# EAGLE board dragonjoy - double (EAGLE 7.3.0)
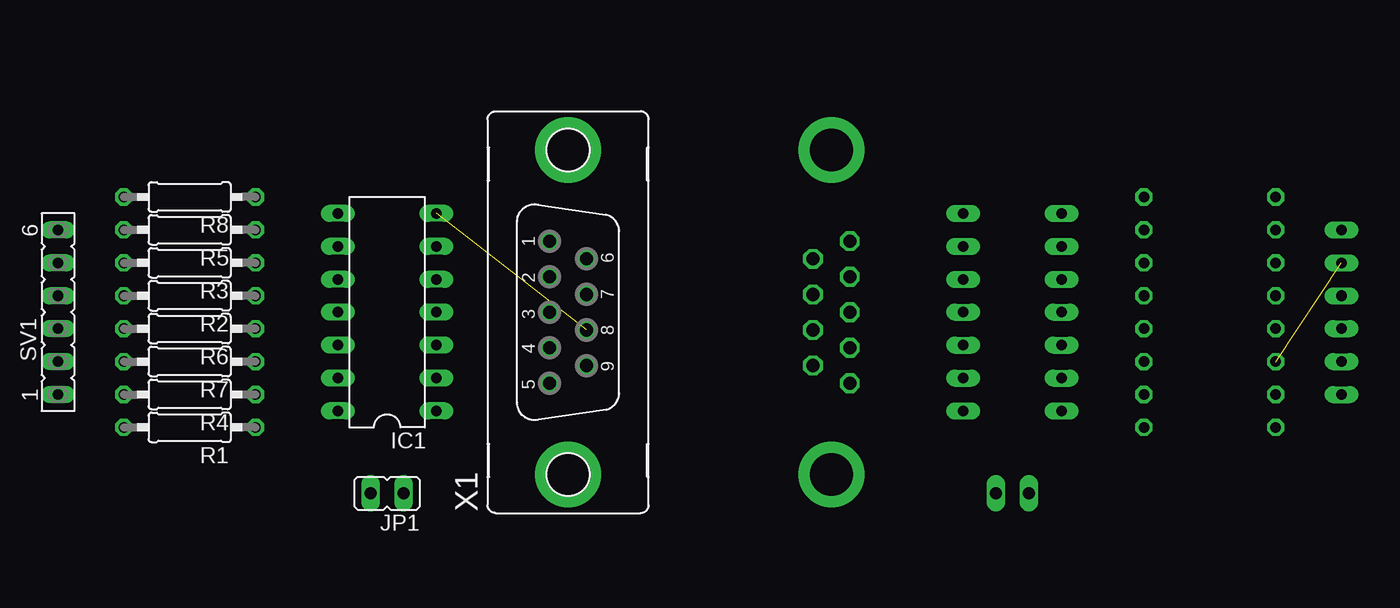
[diagram p0: board, top side]
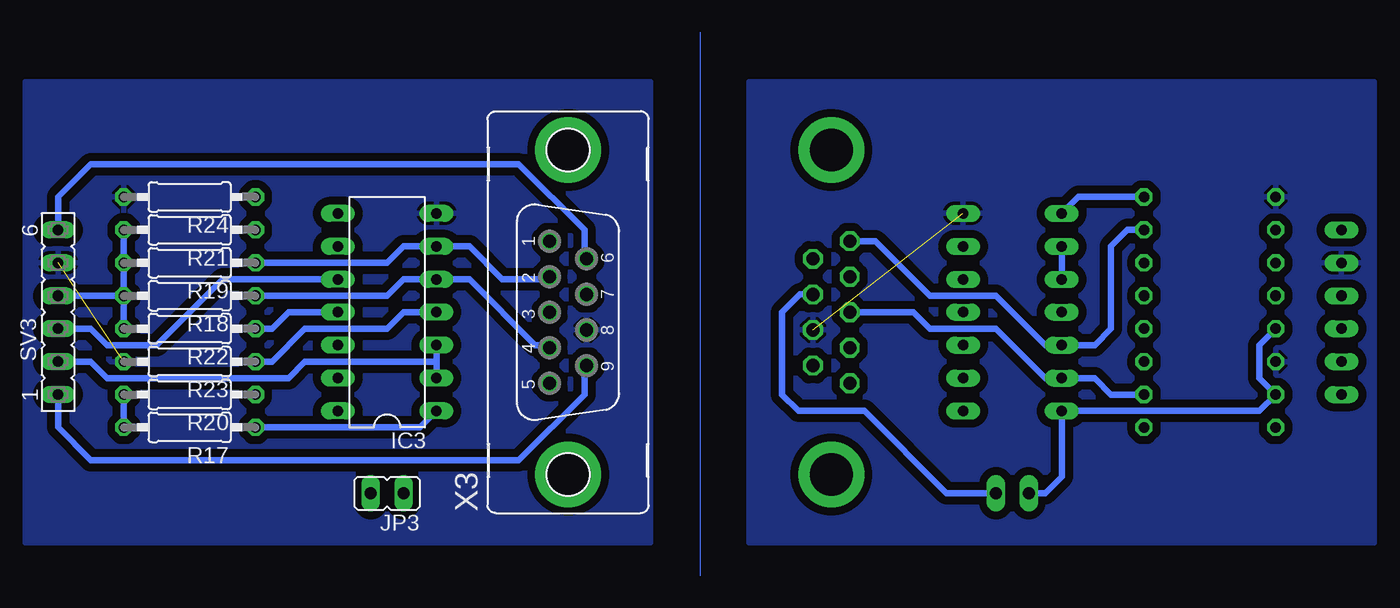
[diagram p1: board, bottom side, seen from below]

No outline drawn. Coordinates in mm, seen from the top.
Copper layers (1*16): Top 0.035mm / dielectric 1.5mm / Bottom 0.035mm
Design rules "default": minimum track width 10mil, minimum drill 24mil, track to track 8mil, track to pad 8mil, pad to pad 8mil, via to via 8mil, smd to smd 8mil, copper to edge 40mil, drill to drill 8mil, minimum pad ring 10mil, minimum via ring 8mil, stop-mask expansion 4mil, vias tented up to drill 0mil, thermal gap 10mil

## Footprints (pad centres in the part's own frame; a part is rotated, then mirrored left to right if it is on the bottom)
DIL14 = drill 0.813 long: 1 -7.62,-3.81; 2 -5.08,-3.81; 3 -2.54,-3.81; 4 0,-3.81; 5 2.54,-3.81; 6 5.08,-3.81; 7 7.62,-3.81; 8 7.62,3.81; 9 5.08,3.81; 10 2.54,3.81; 11 0,3.81; 12 -2.54,3.81; 13 -5.08,3.81; 14 -7.62,3.81
JP1 = drill 0.914 long: 1 0,-1.27; 2 0,1.27
0207/10 = drill 0.813 octagon: 1 -5.08,0; 2 5.08,0
FE06 = drill 0.813 long: 1 -6.35,0; 2 -3.81,0; 3 -1.27,0; 4 1.27,0; 5 3.81,0; 6 6.35,0
F09VP = drill 1.016 octagon: 1 5.486,1.422; 2 2.743,1.422; 3 0,1.422; 4 -2.743,1.422; 5 -5.486,1.422; 6 4.115,-1.422; 7 1.372,-1.422; 8 -1.372,-1.422; 9 -4.115,-1.422 | drill 3.302 pad 5.08: G1 -12.522,0; G2 12.522,0

## Placement (x,y rotation side)
IC1  4066N  [DIL14]  27.94,53.34 90 top
IC3  4066N  [DIL14]  76.2,53.34 90 bottom
JP1  [JP1]  27.94,39.37 90 top
JP3  [JP1]  76.2,39.37 90 bottom
R1  [0207/10]  12.7,44.45 180 top
R2  [0207/10]  12.7,54.61 180 top
R3  [0207/10]  12.7,57.15 180 top
R4  [0207/10]  12.7,46.99 180 top
R5  [0207/10]  12.7,59.69 180 top
R6  [0207/10]  12.7,52.07 180 top
R7  [0207/10]  12.7,49.53 180 top
R8  [0207/10]  12.7,62.23 180 top
R17  [0207/10]  91.44,44.45 180 bottom
R18  [0207/10]  91.44,54.61 180 bottom
R19  [0207/10]  91.44,57.15 180 bottom
R20  [0207/10]  91.44,46.99 180 bottom
R21  [0207/10]  91.44,59.69 180 bottom
R22  [0207/10]  91.44,52.07 180 bottom
R23  [0207/10]  91.44,49.53 180 bottom
R24  [0207/10]  91.44,62.23 180 bottom
SV1  [FE06]  2.54,53.34 90 top
SV3  [FE06]  101.6,53.34 90 bottom
X1  [F09VP]  41.91,53.34 90 top
X3  [F09VP]  62.23,53.34 90 bottom

## Library data of the parts
IC1 IC3 = 40xx
JP1 JP3 = jumper
R1-R8 R17-R24 = rcl
SV1 SV3 = con-lsta; OC_FARNELL: unknown; OC_NEWARK: unknown
X1 X3 = con-subd; OC_FARNELL: unknown; OC_NEWARK: unknown

## Nets
DN2: IC3.6 R19.1 X3.2
FIRE4: SV3.6 X3.6
FIRE5: SV3.1 X3.9
GND: IC1.7 R7.2 R8.2 SV1.5 X1.8
GND2: IC3.7 R23.2 R24.2 SV3.5 X3.8
LT: IC1.13 R4.1 X1.3
N$1: JP1.1 X1.7
N$10: IC1.8 R8.1
N$11: IC3.1 R17.1
N$12: IC3.11 R22.1
N$13: IC3.4 R23.1
RT2: IC3.5 R18.1 X3.4
S$2: R18.2 R19.2 R21.2 R22.2 SV3.4
UP: IC1.12 R5.1 X1.1
VCC: IC1.14 JP1.2 R4.2 R6.2
VCC2: R17.2 R20.2
X2: IC3.2 IC3.3 SV3.2
Y: IC1.9 IC1.10
Y2: IC3.10 SV3.3

## Tracks (layer width: path | path; a pad name or v marks a point on that pad's centre or on a via)
DN2
  Bottom 0.508: X3.2 63.65,56.03 63.5,55.88 67.31,55.88 69.85,58.42 IC3.6 74.93,58.42 76.2,57.15 R19.1
FIRE4
  Bottom 0.508: SV3.6 101.6,62.23 99.06,64.77 66.04,64.77 60.96,59.69 60.96,57.61 X3.6
FIRE5
  Bottom 0.508: SV3.1 101.6,44.45 99.06,41.91 66.04,41.91 60.96,46.99 60.96,49.07 X3.9
GND  (1 unrouted)
  pour Bottom (isolate 0.61): 0,71.12 48.26,71.12 48.26,35.56 0,35.56
GND2  (1 unrouted)
  pour Bottom (isolate 0.61): 104.14,71.12 55.88,71.12 55.88,35.56 104.14,35.56
LT
  Bottom 0.508: 40.64,53.34 X1.3 35.56,53.34 34.29,52.07 29.21,52.07 25.4,48.26 IC1.13 21.59,48.26 20.32,46.99 R4.1
N$1
  Bottom 0.508: X1.7 44.35,54.71 45.72,53.34 45.72,46.99 44.45,45.72 39.37,45.72 33.02,39.37 JP1.1
N$10
  Bottom 0.508: R8.1 22.86,62.23 IC1.8
N$11
  Bottom 0.508: IC3.1 73.66,44.45 R17.1
N$12
  Bottom 0.508: R22.1 85.09,52.07 83.82,53.34 IC3.11
N$13
  Bottom 0.508: R23.1 85.09,49.53 82.55,52.07 76.2,52.07 74.93,53.34 IC3.4
RT2
  Bottom 0.508: X3.4 63.65,50.65 63.5,50.8 64.77,50.8 69.85,55.88 IC3.5 74.93,55.88 76.2,54.61 R18.1
S$1
  Bottom 0: 52.07,74.93 52.07,33.02
S$2
  Bottom 0.508: R21.2 R19.2 R18.2 | R18.2 SV3.4 | R22.2 R18.2
UP
  Bottom 0.508: X1.1 38.51,58.83 34.29,54.61 29.21,54.61 25.4,50.8 IC1.12 21.59,50.8 20.32,52.07 20.32,58.42 19.05,59.69 R5.1
VCC
  Bottom 0.508: R6.2 8.89,50.8 8.89,48.26 R4.2 8.89,45.72 IC1.14 24.13,40.64 25.4,39.37 JP1.2
VCC2
  Bottom 0.508: R17.2 R20.2
X2
  Bottom 0.508: IC3.3 72.39,49.53 | 72.39,49.53 IC3.2 | SV3.2 99.06,49.53 97.79,48.26 83.82,48.26 82.55,49.53 72.39,49.53
Y
  Bottom 0.508: IC1.9 IC1.10
Y2
  Bottom 0.508: SV3.3 99.06,52.07 97.79,50.8 93.98,50.8 88.9,55.88 IC3.10